# Altium PCB iForce-FPC-V0.1.PcbDoc (part 2 of 2)
Units mil, origin at the board's own origin, x right, y up, seen from the top; angles counter-clockwise.
Board outline 803.81 x 551.18 mil, 2 copper layers (Top Layer, Bottom Layer); 1 components, 2 nets, 4 pads, 4 vias.
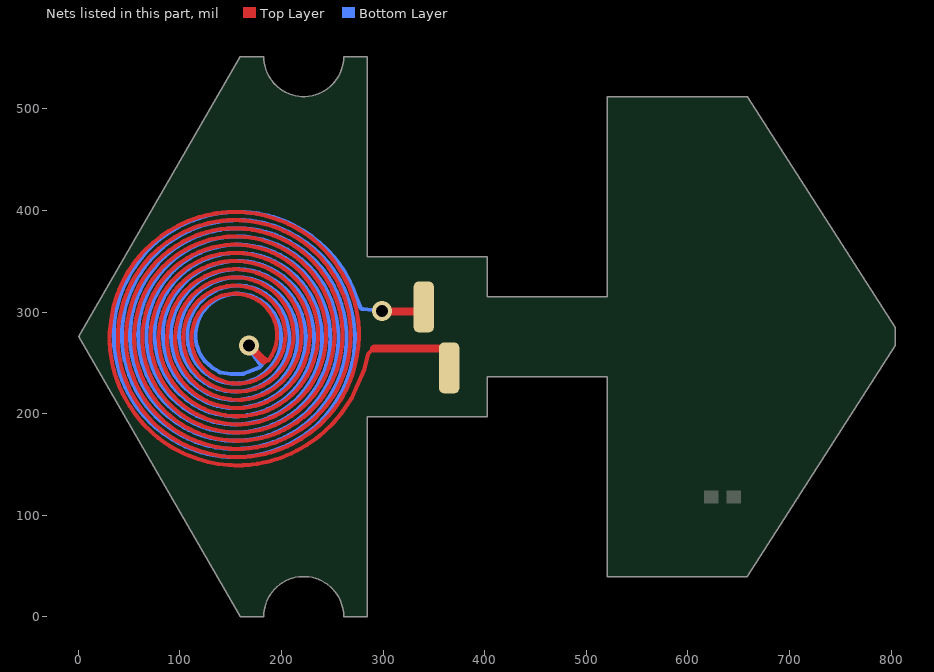
[diagram p2: the nets of this part, all layers, seen from the top]

## Via types
v1: diameter 19.68, hole 11.81, Top Layer to Bottom Layer, tented both sides, 4 vias

## Nets (pads, with @x,y where several pads share a name; then routed paths per layer and width w, separated by ;. In a path a pad name is that pad's centre, name@x,y a point inside that pad or via, vN(x,y) a via of type N, cw(c..) or ccw(c..) an arc to the next point about the centre after c; other vN are vias at no path point) (continued)
L2: pad.1 | length 11550.5
  Top Layer w3: pad.1@335,300.53 pad.1@340,305
  Top Layer w4: 182.46,252.54 187.25,252.54 ccw(c156.65,276.38) 192.85,262.45 ccw(c153.83,277.59) 194.57,267.99 ccw(c153.87,277.6) 195.51,273.73 ccw(c155.47,277.46) 195.63,279.54 ccw(c156.78,277.46) 193.31,290.84 ccw(c154.68,276.77) 190.95,296.12 ccw(c154.23,276.54) 184.17,305.45 ccw(c155.27,277.53) 179.88,309.3 ccw(c155.13,277.29) 175.08,312.49 ccw(c154.29,275.81) 169.87,314.99 ccw(c153.93,274.93) 164.37,316.76 ccw(c153.93,274.96) 158.68,317.78 ccw(c154.03,275.98) 152.91,318.02 ccw(c153.99,277.61) 147.17,317.46 ccw(c154.22,276.37) 141.57,316.09 ccw(c154.71,274.83) 136.19,313.98 ccw(c154.87,274.38) 122.35,303.7 ccw(c153.74,275.59) 115.92,294.15 ccw(c155.84,274.48) 113.71,288.82 ccw(c156.4,274.27) 111.41,277.5 ccw(c155.01,274.38) 111.38,271.73 ccw(c154.43,274.41) 113.62,260.44 ccw(c156.72,275.12) 115.83,255.1 ccw(c157.3,275.39) 122.16,245.45 ccw(c156.28,274.53) 126.18,241.3 ccw(c155.64,273.9) 135.66,234.77 ccw(c156.81,276.04) 140.95,232.46 ccw(c157.04,276.59) 157.97,229.63 ccw(c157.03,274.1) 163.72,230.12 ccw(c156.88,274.91) 169.35,231.35 ccw(c156.41,276.57) 174.8,233.28 ccw(c156,277.55) 179.98,235.86 ccw(c156.07,277.47) 189.22,242.77 ccw(c157.36,276.1) 193.13,247.01 ccw(c157.78,275.71) 196.48,251.71 ccw(c156.2,276.7) 199.22,256.79 ccw(c154.96,277.28) 201.33,262.17 ccw(c154.5,277.44) 203.6,273.49 ccw(c155.85,277.32) 203.71,279.27 ccw(c157.51,277.39) 203.12,285 ccw(c156.33,277.17) 201.82,290.62 ccw(c154.72,276.7) 199.86,296.06 ccw(c153.76,276.29) 197.28,301.23 ccw(c153.81,276.35) 190.43,310.52 ccw(c155.13,277.56) 186.24,314.5 ccw(c155.85,278.39) 181.61,317.94 ccw(c154.85,276.85) 176.6,320.8 ccw(c154.18,275.5) 171.28,323.06 ccw(c153.94,274.92) 154.28,326.09 ccw(c154,277.22) 148.52,325.78 ccw(c154,277.6) 142.84,324.79 ccw(c154.43,275.77) 137.3,323.14 ccw(c154.9,274.46) 131.98,320.87 ccw(c155.03,274.11) 117.97,310.78 ccw(c153.32,275.87) 114.16,306.44 ccw(c153.28,275.95) 110.89,301.69 ccw(c154.87,274.99) 108.17,296.6 ccw(c156.11,274.41) 106.03,291.23 ccw(c156.43,274.27) 103.26,274.18 ccw(c154,274.31) 103.6,268.42 ccw(c153.69,274.31) 104.6,262.74 ccw(c155.52,274.74) 106.23,257.2 ccw(c156.86,275.22) 108.46,251.87 ccw(c157.36,275.43) 118.35,237.69 ccw(c155.72,273.91) 122.59,233.77 ccw(c155.08,273.16) 127.23,230.36 ccw(c156.1,274.73) 132.24,227.48 ccw(c156.8,276.11) 137.52,225.15 ccw(c157.14,276.98) 154.45,221.63 ccw(c157.02,275.14) 160.22,221.67 ccw(c157.06,274) 171.57,223.62 ccw(c156.4,276.48) 177.03,225.5 ccw(c155.96,277.57) 182.28,227.94 ccw(c155.81,277.87) 191.88,234.37 ccw(c156.62,276.89) 196.13,238.29 ccw(c157.8,275.74) 199.93,242.62 ccw(c158,275.54) 203.24,247.35 ccw(c156.4,276.54) 206.04,252.4 ccw(c155.08,277.19) 208.3,257.72 ccw(c154.32,277.48) 211.73,274.66 ccw(c156.2,277.36) 211.71,280.44 ccw(c157.92,277.46) 211.08,286.17 ccw(c156.77,277.24) 209.85,291.81 ccw(c155.07,276.78) 208.04,297.29 ccw(c153.89,276.33) 205.69,302.57 ccw(c153.59,276.21) 195.68,316.68 ccw(c155.26,277.75) 191.47,320.62 ccw(c155.66,278.14) 181.94,327.09 ccw(c154.39,275.88) 176.72,329.58 ccw(c153.95,274.84) 171.28,331.53 ccw(c153.91,274.82) 154.18,334.13 ccw(c153.97,277.27) 148.42,333.86 ccw(c153.88,278.34) 142.72,333 ccw(c154.26,276.5) 137.13,331.57 ccw(c154.74,274.95) 131.7,329.58 ccw(c155.15,273.95) 126.49,327.08 ccw(c155.28,273.7) 116.88,320.65 ccw(c154.5,274.66) 112.59,316.78 ccw(c153.39,275.77) 108.71,312.51 ccw(c152.54,276.5) 105.28,307.88 ccw(c154.09,275.46) 102.33,302.92 ccw(c155.54,274.69) 99.87,297.69 ccw(c156.57,274.26) 97.91,292.25 ccw(c156.63,274.21) 95.21,275.16 ccw(c154.28,274.29) 95.41,269.39 ccw(c153.55,274.28) 97.51,258.06 ccw(c156.1,274.97) 99.37,252.59 ccw(c157.24,275.41) 101.74,247.32 ccw(c157.58,275.56) 111.6,233.11 ccw(c156.04,274.19) 115.72,229.06 ccw(c154.85,272.85) 120.21,225.43 ccw(c155.38,273.62) 125.03,222.26 ccw(c156.31,275.19) 130.13,219.56 ccw(c156.91,276.46) 135.47,217.34 ccw(c157.14,276.98) 158.16,213.53 ccw(c157.1,273.98) 163.92,213.91 ccw(c157.15,273.31) 169.61,214.84 ccw(c156.75,275.19) 175.19,216.3 ccw(c156.27,276.73) 180.62,218.28 ccw(c155.85,277.76) 185.85,220.74 ccw(c155.79,277.91) 199.95,230.77 ccw(c157.26,276.29) 203.98,234.91 ccw(c158.6,275.1) 207.59,239.41 ccw(c157.8,275.66) 210.77,244.23 ccw(c156.22,276.6) 213.48,249.32 ccw(c154.94,277.22) 215.74,254.64 ccw(c154.24,277.5) 219.84,277.29 ccw(c157,277.41) 219.59,283.06 ccw(c157.64,277.42) 217.49,294.39 ccw(c155.07,276.74) 215.67,299.87 ccw(c153.86,276.28) 213.37,305.18 ccw(c153.25,276) 203.86,319.64 ccw(c154.53,277.07) 199.9,323.85 ccw(c155.69,278.27) 195.58,327.67 ccw(c156.33,279.04) 190.93,331.08 ccw(c155.28,277.45) 185.98,334.06 ccw(c154.47,275.97) 180.79,336.59 ccw(c153.98,274.85) 175.39,338.66 ccw(c153.8,274.34) 158.41,342.03 ccw(c153.94,276.1) 152.63,342.17 ccw(c153.91,277.79) 146.88,341.8 ccw(c153.83,278.69) 141.18,340.91 ccw(c154.21,276.81) 135.58,339.51 ccw(c154.69,275.2) 130.12,337.62 ccw(c155.14,274.05) 124.83,335.28 ccw(c155.39,273.53) 110.4,325.71 ccw(c154.29,274.83) 106.19,321.76 ccw(c153.11,275.98) 102.35,317.45 ccw(c152.88,276.24) 95.88,307.91 ccw(c155.2,274.9) 93.29,302.75 ccw(c156.39,274.36) 91.14,297.38 ccw(c156.88,274.16) 87.16,274.69 ccw(c154.1,274.25) 87.37,268.92 ccw(c152.95,274.19) 89.3,257.56 ccw(c155.54,274.82) 90.99,252.04 ccw(c156.89,275.3) 93.14,246.67 ccw(c157.8,275.7) 105.86,227.46 ccw(c156.05,274.15) 109.97,223.41 ccw(c154.85,272.82) 114.41,219.71 ccw(c154.88,272.91) 119.14,216.42 ccw(c155.9,274.52) 124.15,213.54 ccw(c156.65,275.95) 129.38,211.09 ccw(c157.1,277.01) 134.79,209.06 ccw(c157.26,277.47) 151.78,205.68 ccw(c157.11,275.77) 157.55,205.48 ccw(c157.12,274.15) 163.31,205.75 ccw(c157.16,273.3) 174.66,207.77 ccw(c156.5,275.93) 180.18,209.49 ccw(c156.03,277.27) 185.54,211.64 ccw(c155.61,278.2) 204.8,224.3 ccw(c157.08,276.52) 208.91,228.36 ccw(c158.37,275.33) 212.65,232.75 ccw(c158.81,274.95) 216.02,237.44 ccw(c157.19,276.01) 218.98,242.39 ccw(c155.71,276.82) 221.54,247.57 ccw(c154.54,277.34) 223.67,252.94 ccw(c153.97,277.56) 227.87,275.6 ccw(c156.53,277.43) 227.78,281.38 ccw(c158.35,277.54) 227.23,287.12 ccw(c158.13,277.48) 226.19,292.8 ccw(c156.26,277.06) 224.7,298.37 ccw(c154.71,276.58) 222.77,303.82 ccw(c153.6,276.14) 220.41,309.1 ccw(c153.23,275.99) 207.16,327.96 ccw(c155.22,277.81) 202.99,331.95 ccw(c156.44,279.19) 198.51,335.58 ccw(c156.15,278.77) 193.75,338.84 ccw(c155.15,277.16) 188.74,341.71 ccw(c154.4,275.74) 183.51,344.17 ccw(c153.94,274.65) 178.11,346.23 ccw(c153.79,274.29) 155.4,350.22 ccw(c153.91,276.97) 149.63,350.11 ccw(c153.8,278.79) 143.89,349.54 ccw(c153.86,278.55) 138.21,348.51 ccw(c154.28,276.68) 132.64,347.03 ccw(c154.76,275.11) 127.18,345.12 ccw(c155.21,273.96) 121.89,342.8 ccw(c155.44,273.44) 102.87,329.76 ccw(c153.78,275.3) 98.81,325.66 ccw(c152.47,276.5) 95.08,321.25 ccw(c152.06,276.85) 91.72,316.56 ccw(c153.69,275.78) 88.74,311.62 ccw(c155.19,274.95) 86.14,306.46 ccw(c156.4,274.39) 83.94,301.12 ccw(c157.28,274.06) 79.23,278.54 ccw(c155.16,274.23) 79.13,272.77 ccw(c153.48,274.19) 79.46,267 ccw(c152.69,274.15) 81.48,255.65 ccw(c155.35,274.8) 83.14,250.12 ccw(c156.76,275.28) 85.21,244.73 ccw(c157.73,275.69) 87.67,239.49 ccw(c158.1,275.88) 97.26,225.06 ccw(c156.87,274.88) 101.13,220.77 ccw(c155.78,273.81) 105.3,216.78 ccw(c154.56,272.43) 109.77,213.13 ccw(c154.66,272.6) 114.5,209.83 ccw(c155.69,274.23) 119.48,206.91 ccw(c156.49,275.69) 124.66,204.36 ccw(c157.01,276.87) 130.03,202.2 ccw(c157.31,277.66) 152.62,197.56 ccw(c157.14,275.53) 158.39,197.44 ccw(c157.17,273.86) 164.16,197.75 ccw(c157.24,272.78) 175.52,199.68 ccw(c156.61,275.44) 181.07,201.29 ccw(c156.13,276.9) 186.49,203.29 ccw(c155.7,277.95) 191.75,205.69 ccw(c155.54,278.33) 210.72,218.81 ccw(c157.19,276.46) 214.81,222.89 ccw(c158.48,275.27) 218.58,227.26 ccw(c158.61,275.1) 225.07,236.79 ccw(c156.24,276.51) 227.77,241.89 ccw(c154.93,277.14) 230.1,247.18 ccw(c153.69,277.63) 233.62,258.2 ccw(c153.7,277.65) 235.55,269.6 ccw(c155.03,277.51) 235.91,275.37 ccw(c156.5,277.47) 235.86,281.14 ccw(c158.28,277.55) 235.38,286.89 ccw(c159.04,277.63) 234.47,292.59 ccw(c157.13,277.25) 233.14,298.2 ccw(c155.43,276.78) 231.4,303.71 ccw(c154.08,276.31) 229.28,309.09 ccw(c152.91,275.78) 223.93,319.34 ccw(c152.94,275.83) 217.22,328.76 ccw(c154,276.69) 213.39,333.09 ccw(c155.06,277.7) 209.27,337.13 ccw(c156.27,279.02) 204.86,340.86 ccw(c156.8,279.67) 200.2,344.25 ccw(c155.71,278.05) 195.3,347.3 ccw(c154.83,276.52) 190.18,349.98 ccw(c154.2,275.21) 184.89,352.31 ccw(c153.72,273.97) 173.88,355.84 ccw(c153.69,273.93) 162.49,357.83 ccw(c153.83,275.21) 156.72,358.23 ccw(c153.88,276.63) 150.95,358.23 ccw(c153.81,278.38) 145.19,357.81 ccw(c153.81,278.83) 133.85,355.73 ccw(c154.47,276.13) 128.31,354.09 ccw(c154.95,274.69) 122.9,352.06 ccw(c155.38,273.66) 117.64,349.67 ccw(c155.58,273.2) 98.54,336.71 ccw(c154.09,274.94) 94.38,332.7 ccw(c152.89,276.1) 90.52,328.42 ccw(c151.81,277.02) 83.77,319.07 ccw(c154.08,275.58) 80.9,314.06 ccw(c155.52,274.83) 78.39,308.85 ccw(c156.67,274.31) 76.24,303.49 ccw(c157.32,274.06) 71.07,275.16 ccw(c154.18,274.19) 71.2,269.39 ccw(c152.35,274.08) 71.74,263.65 ccw(c151.94,274.05) 72.68,257.96 ccw(c153.86,274.44) 74.03,252.34 ccw(c155.56,274.91) 75.76,246.83 ccw(c156.92,275.38) 77.86,241.45 ccw(c158.16,275.92) 83.11,231.15 ccw(c158.28,275.98) 89.68,221.63 ccw(c157.35,275.25) 93.42,217.22 ccw(c156.36,274.35) 97.45,213.08 ccw(c155.19,273.13) 101.74,209.22 ccw(c154.27,272.05) 111.09,202.47 ccw(c155.71,274.32) 116.09,199.59 ccw(c156.48,275.77) 121.29,197.06 ccw(c157.01,276.95) 126.64,194.87 ccw(c157.33,277.77) 154.91,189.41 ccw(c157.17,274.87) 160.69,189.45 ccw(c157.25,273.1) 166.44,189.89 ccw(c157.25,272.64) 177.79,191.95 ccw(c156.6,275.35) 183.34,193.56 ccw(c156.12,276.83) 188.77,195.53 ccw(c155.68,277.94) 194.06,197.86 ccw(c155.33,278.67) 213.42,210.44 ccw(c156.53,277.21) 217.69,214.33 ccw(c157.6,276.11) 221.69,218.49 ccw(c158.95,274.9) 225.4,222.91 ccw(c159.6,274.36) 228.79,227.57 ccw(c157.99,275.46) 231.86,232.46 ccw(c156.43,276.36) 234.6,237.54 ccw(c155.08,277.04) 237,242.8 ccw(c154.03,277.48) 239.06,248.21 ccw(c153.37,277.71) 243.73,270.81 ccw(c155.34,277.53) 243.98,276.58 ccw(c156.88,277.51) 243.85,282.36 ccw(c158.71,277.61) 243.34,288.1 ccw(c159.47,277.69) 242.43,293.8 ccw(c157.55,277.32) 241.15,299.43 ccw(c155.81,276.86) 239.49,304.96 ccw(c154.37,276.38) 237.47,310.37 ccw(c153.31,275.95) 235.11,315.65 ccw(c152.64,275.62) 222.5,334.99 ccw(c154.11,276.83) 218.62,339.27 ccw(c155.2,277.89) 214.47,343.28 ccw(c156.41,279.22) 210.06,347.01 ccw(c156.58,279.38) 200.56,353.55 ccw(c155.12,276.98) 195.5,356.33 ccw(c154.41,275.59) 190.27,358.79 ccw(c153.93,274.48) 184.89,360.91 ccw(c153.67,273.8) 156.59,366.29 ccw(c153.84,276.7) 150.81,366.28 ccw(c153.78,278.44) 145.05,365.89 ccw(c153.69,279.54) 133.68,363.98 ccw(c154.3,276.84) 128.11,362.47 ccw(c154.78,275.27) 122.64,360.61 ccw(c155.25,274.04) 117.3,358.4 ccw(c155.74,272.96) 107.06,353.02 ccw(c155.73,272.95) 97.57,346.41 ccw(c154.99,273.88) 93.15,342.68 ccw(c154.11,274.86) 88.98,338.69 ccw(c152.93,276.01) 85.07,334.43 ccw(c151.51,277.24) 81.45,329.94 ccw(c151.66,277.15) 78.14,325.22 ccw(c153.29,276.08) 75.14,320.29 ccw(c154.82,275.22) 72.45,315.17 ccw(c156.14,274.58) 70.09,309.9 ccw(c157.5,274.03) 66.37,298.95 ccw(c157.68,273.95) 63.34,281.88 ccw(c155.91,274.13) 63.04,276.11 ccw(c154.42,274.16) 63.09,270.34 ccw(c152.65,274.08) 63.52,264.58 ccw(c151.83,274.02) 65.49,253.22 ccw(c154.56,274.65) 67.02,247.65 ccw(c156.12,275.13) 68.89,242.18 ccw(c157.35,275.59) 71.1,236.84 ccw(c158.44,276.09) 76.47,226.6 ccw(c158.22,275.92) 86.73,212.63 ccw(c156.64,274.56) 90.69,208.43 ccw(c155.5,273.42) 94.91,204.48 ccw(c154.28,272.03) 99.36,200.81 ccw(c153.92,271.6) 104.04,197.44 ccw(c155.02,273.23) 108.93,194.37 ccw(c155.94,274.79) 114,191.61 ccw(c156.63,276.17) 119.24,189.17 ccw(c157.11,277.27) 124.62,187.05 ccw(c157.4,278.05) 152.89,181.43 ccw(c157.21,275.39) 158.66,181.34 ccw(c157.24,273.72) 164.43,181.61 ccw(c157.39,271.83) 170.16,182.24 ccw(c157.33,272.05) 175.85,183.24 ccw(c156.93,273.97) 181.46,184.59 ccw(c156.47,275.67) 186.98,186.29 ccw(c155.99,277.08) 192.39,188.32 ccw(c155.4,278.5) 202.81,193.34 ccw(c155.22,278.86) 217.15,203.08 ccw(c156.19,277.64) 221.52,206.87 ccw(c157.14,276.62) 225.64,210.91 ccw(c158.36,275.45) 229.5,215.2 ccw(c159.81,274.22) 233.09,219.72 ccw(c159.41,274.49) 236.39,224.45 ccw(c157.78,275.55) 239.38,229.39 ccw(c156.26,276.42) 242.07,234.5 ccw(c154.93,277.07) 244.45,239.76 ccw(c153.52,277.64) 248.27,250.68 ccw(c153.13,277.78) 251.54,267.71 ccw(c154.67,277.6) 251.95,273.47 ccw(c156.05,277.54) 252.02,279.25 ccw(c157.73,277.58) 251.74,285.02 ccw(c159.62,277.73) 251.11,290.75 ccw(c159.42,277.68) 250.12,296.43 ccw(c157.51,277.28) 248.78,302.05 ccw(c155.79,276.82) 247.1,307.57 ccw(c154.36,276.34) 245.09,312.99 ccw(c152.89,275.73) 240.14,323.45 ccw(c152.63,275.63) 226.8,342.29 ccw(c154.49,277.24) 222.81,346.47 ccw(c155.63,278.4) 218.58,350.4 ccw(c156.86,279.8) 214.12,354.06 ccw(c157.25,280.28) 209.45,357.44 ccw(c156.15,278.65) 204.57,360.53 ccw(c155.22,277.08) 199.52,363.32 ccw(c154.49,275.67) 194.3,365.81 ccw(c153.98,274.52) 188.95,367.99 ccw(c153.64,273.66) 155,374.37 ccw(c153.8,277.19) 149.23,374.27 ccw(c153.71,278.98) 143.47,373.82 ccw(c153.64,279.88) 132.1,371.88 ccw(c154.26,277.14) 126.52,370.4 ccw(c154.73,275.53) 121.04,368.6 ccw(c155.21,274.22) 115.66,366.47 ccw(c155.76,272.95) 105.31,361.32 ccw(c155.84,272.76) 91.03,351.48 ccw(c154.82,274.03) 86.68,347.67 ccw(c153.87,275.06) 82.56,343.63 ccw(c152.65,276.23) 78.68,339.35 ccw(c151.21,277.46) 75.07,334.85 ccw(c151.26,277.45) 71.74,330.14 ccw(c152.9,276.36) 68.69,325.24 ccw(c154.45,275.46) 65.94,320.16 ccw(c155.83,274.76) 63.49,314.93 ccw(c156.96,274.27) 61.33,309.56 ccw(c157.75,273.95) 54.98,275.61 ccw(c154.24,274.12) 55.06,269.83 ccw(c152.46,274.04) 55.48,264.08 ccw(c151.23,273.93) 57.34,252.69 ccw(c153.93,274.52) 58.78,247.1 ccw(c155.58,274.99) 60.54,241.6 ccw(c156.94,275.47) 62.61,236.2 ccw(c158.32,276.05) 67.64,225.79 ccw(c158.5,276.11) 81.01,206.96 ccw(c156.65,274.52) 84.98,202.76 ccw(c155.51,273.38) 89.18,198.8 ccw(c154.3,272.01) 93.6,195.09 ccw(c154.02,271.72) 103.06,188.5 ccw(c155.53,274.12) 108.07,185.63 ccw(c156.31,275.59) 113.24,183.04 ccw(c156.89,276.84) 118.54,180.75 ccw(c157.4,278.13) 129.51,177.06 ccw(c157.49,278.38) 146.55,173.84 ccw(c157.31,276.85) 152.31,173.4 ccw(c157.25,275.5) 158.09,173.28 ccw(c157.26,273.86) 163.86,173.5 ccw(c157.39,272.01) 169.6,174.04 ccw(c157.34,272) 180.94,176.14 ccw(c156.69,274.77) 186.51,177.68 ccw(c156.21,276.34) 191.98,179.53 ccw(c155.75,277.61) 197.35,181.68 ccw(c155.2,278.84) 207.69,186.86 ccw(c155.11,279.05) 222,196.65 ccw(c156.07,277.83) 226.39,200.42 ccw(c156.98,276.83) 230.55,204.42 ccw(c158.15,275.68) 234.48,208.65 ccw(c159.54,274.46) 238.16,213.09 ccw(c159.61,274.36) 244.72,222.58 ccw(c157.19,275.86) 247.58,227.6 ccw(c155.74,276.64) 250.16,232.76 ccw(c154.49,277.22) 252.45,238.07 ccw(c153.19,277.73) 256.16,249.03 ccw(c152.89,277.84) 259.45,266.06 ccw(c154.34,277.66) 259.93,271.82 ccw(c155.65,277.59) 260.09,277.59 ccw(c157.25,277.59) 259.92,283.36 ccw(c159.07,277.69) 259.44,289.11 ccw(c159.79,277.75) 257.47,300.48 ccw(c157.02,277.13) 256.01,306.06 ccw(c155.39,276.65) 254.24,311.56 ccw(c154.04,276.18) 252.16,316.96 ccw(c152.65,275.59) 247.16,327.38 ccw(c152.36,275.47) 233.96,346.34 ccw(c154.09,276.91) 230.05,350.6 ccw(c155.18,277.97) 225.92,354.63 ccw(c156.38,279.28) 221.57,358.42 ccw(c157.59,280.75) 217.01,361.96 ccw(c157.04,279.97) 212.26,365.24 ccw(c155.99,278.34) 207.33,368.24 ccw(c155.11,276.8) 202.24,370.96 ccw(c154.42,275.44) 197,373.41 ccw(c153.76,273.88) 186.16,377.44 ccw(c153.51,273.17) 163.51,381.98 ccw(c153.71,275.05) 157.74,382.35 ccw(c153.77,276.45) 151.96,382.41 ccw(c153.74,278.13) 146.2,382.15 ccw(c153.6,280.01) 140.46,381.57 ccw(c153.52,280.75) 134.76,380.67 ccw(c153.88,278.81) 129.12,379.45 ccw(c154.33,277.01) 123.55,377.92 ccw(c154.81,275.43) 118.07,376.08 ccw(c155.28,274.13) 112.7,373.96 ccw(c155.84,272.83) 102.31,368.86 ccw(c155.89,272.68) 83.42,355.57 ccw(c154.4,274.45) 79.18,351.65 ccw(c153.32,275.55) 75.15,347.51 ccw(c152.02,276.75) 71.36,343.15 ccw(c150.54,277.97) 67.82,338.6 ccw(c151.27,277.45) 64.54,333.85 ccw(c152.9,276.39) 61.53,328.93 ccw(c154.45,275.5) 58.79,323.85 ccw(c155.83,274.8) 56.32,318.62 ccw(c157.42,274.11) 52.22,307.81 ccw(c158.05,273.87) 47.05,279.43 ccw(c155.25,274.08) 46.92,273.65 ccw(c153.63,274.07) 47.1,267.88 ccw(c151.8,273.96) 47.59,262.13 ccw(c150.97,273.9) 49.53,250.76 ccw(c153.75,274.5) 50.96,245.17 ccw(c155.41,274.97) 52.69,239.66 ccw(c156.8,275.45) 54.71,234.24 ccw(c158.3,276.07) 59.59,223.76 ccw(c158.89,276.35) 72.45,204.56 ccw(c157.41,275.16) 76.26,200.21 ccw(c156.38,274.21) 80.29,196.08 ccw(c155.22,273.02) 84.53,192.16 ccw(c154,271.62) 88.98,188.48 ccw(c153.79,271.41) 98.44,181.89 ccw(c155.32,273.84) 103.43,178.98 ccw(c156.14,275.32) 108.57,176.35 ccw(c156.76,276.63) 113.85,173.98 ccw(c157.36,278.07) 124.73,170.07 ccw(c157.54,278.6) 147.41,165.67 ccw(c157.33,276.65) 153.18,165.31 ccw(c157.28,275.24) 158.96,165.24 ccw(c157.31,273.57) 164.73,165.49 ccw(c157.44,271.7) 170.47,166.04 ccw(c157.43,271.46) 181.83,168.07 ccw(c156.8,274.26) 187.41,169.55 ccw(c156.32,275.89) 192.91,171.31 ccw(c155.84,277.26) 198.31,173.36 ccw(c155.24,278.71) 208.78,178.27 ccw(c154.97,279.27) 227.97,191.14 ccw(c156.16,277.79) 232.33,194.94 ccw(c157.09,276.77) 236.48,198.96 ccw(c158.27,275.62) 240.41,203.19 ccw(c159.66,274.39) 244.11,207.62 ccw(c160.18,273.95) 250.76,217.04 ccw(c157.78,275.49) 253.7,222.01 ccw(c156.26,276.33) 256.38,227.13 ccw(c154.93,276.99) 258.8,232.38 ccw(c153.4,277.63) 262.82,243.22 ccw(c152.86,277.84) 267.97,271.61 ccw(c155.63,277.63) 268.14,277.38 ccw(c157.22,277.62) 268,283.16 ccw(c159.03,277.71) 267.56,288.91 ccw(c160.55,277.86) 265.76,300.3 ccw(c157.88,277.31) 264.41,305.92 ccw(c156.16,276.85) 262.77,311.45 ccw(c154.67,276.37) 260.85,316.9 ccw(c152.99,275.72) 256.19,327.48 ccw(c152.09,275.29) 240.16,351.48 ccw(c153.95,276.84) 236.26,355.75 ccw(c155.03,277.87) 232.16,359.82 ccw(c156.22,279.14) 227.85,363.66 ccw(c157.45,280.59) 223.36,367.27 ccw(c157.69,280.88) 218.67,370.64 ccw(c156.58,279.24) 213.82,373.76 ccw(c155.61,277.65) 208.8,376.62 ccw(c154.82,276.18) 203.65,379.23 ccw(c154.22,274.91) 198.36,381.57 ccw(c153.64,273.49) 187.47,385.46 ccw(c153.45,272.94) 164.8,389.94 ccw(c153.66,274.79) 159.03,390.35 ccw(c153.72,276.15) 153.26,390.47 ccw(c153.72,277.77) 147.48,390.3 ccw(c153.62,279.59) 141.73,389.83 ccw(c153.49,280.9) 130.34,387.99 ccw(c154.05,278.18) 124.74,386.63 ccw(c154.52,276.46) 119.2,384.98 ccw(c155,274.98) 113.75,383.06 ccw(c155.65,273.3) 103.17,378.41 ccw(c156.11,272.34) 79.1,362.47 ccw(c154.64,274.13) 74.81,358.61 ccw(c153.64,275.19) 70.71,354.54 ccw(c152.41,276.36) 66.83,350.26 ccw(c150.99,277.59) 63.17,345.8 ccw(c150.87,277.72) 56.58,336.33 ccw(c153.3,276.18) 53.66,331.35 ccw(c154.81,275.35) 50.98,326.23 ccw(c156.14,274.69) 48.57,320.98 ccw(c157.68,274.04) 44.52,310.15 ccw(c158.36,273.8) 39.13,281.8 ccw(c155.81,274.02) 38.89,276.02 ccw(c154.29,274.05) 38.93,270.25 ccw(c152.55,273.99) 39.27,264.49 ccw(c150.64,273.83) 39.9,258.75 ccw(c150.23,273.79) 40.82,253.06 ccw(c152.18,274.16) 42.04,247.42 ccw(c154,274.6) 43.55,241.84 ccw(c155.61,275.08) 45.32,236.35 ccw(c156.97,275.55) 47.37,230.94 ccw(c158.45,276.16) 52.24,220.45 ccw(c158.96,276.39) 68.61,196.68 ccw(c156.92,274.68) 72.54,192.44 ccw(c155.82,273.6) 76.67,188.41 ccw(c154.62,272.31) 81,184.59 ccw(c153.39,270.84) 85.51,180.99 ccw(c153.26,270.7) 90.2,177.64 ccw(c154.38,272.35) 95.06,174.52 ccw(c155.34,273.94) 100.07,171.65 ccw(c156.14,275.41) 105.22,169.03 ccw(c156.76,276.7) 110.49,166.66 ccw(c157.37,278.17) 121.35,162.69 ccw(c157.57,278.71) 149.73,157.43 ccw(c157.34,276.08) 155.51,157.2 ccw(c157.32,274.56) 161.28,157.25 ccw(c157.38,272.81) 167.04,157.59 ccw(c157.54,270.91) 172.78,158.22 ccw(c157.59,270.41) 178.47,159.14 ccw(c157.22,272.36) 184.12,160.34 ccw(c156.79,274.18) 189.7,161.83 ccw(c156.31,275.81) 195.2,163.59 ccw(c155.83,277.2) 200.61,165.61 ccw(c155.21,278.72) 211.13,170.42 ccw(c154.89,279.4) 235.04,186.58 ccw(c156.46,277.5) 239.32,190.47 ccw(c157.48,276.42) 243.41,194.55 ccw(c158.72,275.25) 247.29,198.83 ccw(c160.15,274.02) 250.94,203.29 ccw(c160.4,273.78) 257.56,212.74 ccw(c157.97,275.34) 260.52,217.7 ccw(c156.45,276.19) 263.22,222.8 ccw(c155.08,276.88) 265.68,228.03 ccw(c153.47,277.58) 269.85,238.82 ccw(c152.43,277.94) 275.72,267.08 ccw(c154.59,277.71) 276.09,272.85 ccw(c155.99,277.65) 276.18,278.62 ccw(c157.63,277.67) 275.99,284.4 ccw(c159.45,277.77) 275.52,290.15 ccw(c160.97,277.93) 273.73,301.54 ccw(c158.29,277.39) 272.41,307.16 ccw(c156.54,276.93) 270.82,312.71 ccw(c155,276.45) 268.96,318.18 ccw(c153.19,275.77) 264.48,328.84 ccw(c151.91,275.18) 245.4,357.71 ccw(c154.07,277) 241.47,361.95 ccw(c155.17,278.07) 237.34,365.99 ccw(c156.37,279.34) 233.03,369.83 ccw(c157.6,280.8) 228.54,373.45 ccw(c158.05,281.37) 223.87,376.84 ccw(c156.93,279.74) 219.04,380 ccw(c155.93,278.13) 214.06,382.92 ccw(c155.09,276.63) 208.95,385.6 ccw(c154.43,275.28) 203.71,388.04 ccw(c153.74,273.69) 192.91,392.17 ccw(c153.4,272.69) 164.64,398.03 ccw(c153.63,274.84) 158.87,398.41 ccw(c153.69,276.22) 153.1,398.52 ccw(c153.68,277.84) 147.32,398.36 ccw(c153.58,279.66) 141.57,397.91 ccw(c153.39,281.59) 135.85,397.19 ccw(c153.51,280.87) 130.17,396.18 ccw(c153.9,278.94) 124.54,394.9 ccw(c154.35,277.17) 118.98,393.35 ccw(c154.83,275.59) 113.49,391.54 ccw(c155.3,274.26) 108.09,389.47 ccw(c155.91,272.8) 97.6,384.6 ccw(c156.2,272.19) 73.69,368.43 ccw(c154.66,274.06) 69.39,364.56 ccw(c153.67,275.11) 65.28,360.5 ccw(c152.46,276.27) 61.37,356.26 ccw(c151.07,277.49) 57.67,351.83 ccw(c150.19,278.22) 50.93,342.46 ccw(c152.55,276.66) 47.91,337.54 ccw(c154.11,275.76) 45.13,332.48 ccw(c155.53,275.02) 42.58,327.3 ccw(c157.27,274.22) 38.21,316.59 ccw(c158.61,273.73) 31.12,282.71 ccw(c155.87,273.99) 30.85,276.94 ccw(c154.36,274.02) 30.85,271.17 ccw(c152.63,273.98) 31.12,265.4 ccw(c150.73,273.85) 31.66,259.66 ccw(c149.9,273.77) 33.58,248.29 ccw(c152.76,274.37) 34.95,242.68 ccw(c154.53,274.85) 36.58,237.14 ccw(c156.1,275.35) 38.46,231.68 ccw(c157.43,275.84) 40.6,226.31 ccw(c158.88,276.47) 45.59,215.88 ccw(c159.54,276.79) 61.96,192.1 ccw(c157.73,275.29) 65.85,187.82 ccw(c156.7,274.31) 69.92,183.73 ccw(c155.56,273.12) 74.18,179.84 ccw(c154.36,271.73) 78.62,176.15 ccw(c153.69,270.93) 88,169.42 ccw(c155.06,273) 92.91,166.4 ccw(c155.83,274.32) 97.96,163.61 ccw(c156.69,276) 108.43,158.73 ccw(c157.36,277.6) 147.67,149.42 ccw(c157.06,274.73) 153.45,149.12 ccw(c157.02,273.34) 159.23,149.09 ccw(c157.05,271.78) 165.02,149.33 ccw(c157.16,270.11) 170.78,149.84 ccw(c157.25,269.19) 182.22,151.7 ccw(c156.45,273.11) 187.87,153.04 ccw(c155.79,275.62) 193.46,154.64 ccw(c155.1,277.82) 198.97,156.5 ccw(c154.44,279.67) 204.4,158.6 ccw(c153.62,281.63) 214.96,163.5 ccw(c153.27,282.35) 234.53,175.92 ccw(c154.89,280.17) 239.04,179.53 ccw(c156.2,278.6) 243.36,183.31 ccw(c157.88,276.77) 247.5,187.27 ccw(c159.91,274.75) 251.43,191.39 ccw(c162.26,272.61) 255.16,195.68 ccw(c164.9,270.42) 258.65,200.12 268.78,214.68 ccw(c265.49,216.96) 269.16,215.35 281.68,243.99 281.82,244.3 285.32,258.29 285.59,259.36 290.01,263.79 291.27,264
  Top Layer w8: v1(168,267) 182.46,252.54 ; 291.27,264 359.08,264 365,258.08 pad.1@365,245 ; v1@300.83,300.53 pad.1@335,300.53
  Bottom Layer w4: 180.1,250.24 180.1,247.29 178.35,245.54 162.68,239.27 cw(c161.2,242.99) 161.27,238.99 150.19,238.8 140.11,240.52 cw(c140.78,244.46) 138.72,241.03 132.01,245.1 cw(c134.08,248.52) 131.39,245.55 123.78,252.54 cw(c154.38,276.38) 118.18,262.45 cw(c157.2,277.59) 116.46,267.99 cw(c157.16,277.6) 115.52,273.73 cw(c155.56,277.46) 115.4,279.54 cw(c154.25,277.46) 117.72,290.84 cw(c156.35,276.77) 120.07,296.12 cw(c156.8,276.54) 126.85,305.45 cw(c155.76,277.53) 131.15,309.3 cw(c155.9,277.29) 135.95,312.49 cw(c156.74,275.81) 141.16,314.99 cw(c157.1,274.93) 146.66,316.76 cw(c157.1,274.96) 152.35,317.78 cw(c157,275.98) 158.12,318.02 cw(c157.04,277.61) 163.86,317.46 cw(c156.81,276.37) 169.46,316.09 cw(c156.32,274.83) 174.84,313.98 cw(c156.15,274.38) 188.67,303.7 cw(c157.29,275.59) 195.11,294.15 cw(c155.18,274.48) 197.32,288.82 cw(c154.62,274.27) 199.61,277.5 cw(c156.02,274.38) 199.65,271.73 cw(c156.6,274.41) 197.41,260.44 cw(c154.31,275.12) 195.2,255.1 cw(c153.73,275.39) 188.87,245.45 cw(c154.75,274.53) 184.85,241.3 cw(c155.39,273.9) 175.37,234.77 cw(c154.22,276.04) 170.08,232.46 cw(c153.99,276.59) 153.06,229.63 cw(c153.99,274.1) 147.31,230.12 cw(c154.15,274.91) 141.67,231.35 cw(c154.62,276.57) 136.23,233.28 cw(c155.03,277.55) 131.05,235.86 cw(c154.96,277.47) 121.81,242.77 cw(c153.67,276.1) 117.89,247.01 cw(c153.24,275.71) 114.55,251.71 cw(c154.83,276.7) 111.81,256.79 cw(c156.07,277.28) 109.7,262.17 cw(c156.53,277.44) 107.43,273.49 cw(c155.18,277.32) 107.32,279.27 cw(c153.52,277.39) 107.91,285 cw(c154.7,277.17) 109.21,290.62 cw(c156.31,276.7) 111.17,296.06 cw(c157.27,276.29) 113.75,301.23 cw(c157.22,276.35) 120.6,310.52 cw(c155.9,277.56) 124.79,314.5 cw(c155.17,278.39) 129.42,317.94 cw(c156.18,276.85) 134.43,320.8 cw(c156.85,275.5) 139.75,323.06 cw(c157.09,274.92) 156.75,326.09 cw(c157.02,277.22) 162.51,325.78 cw(c157.03,277.6) 168.19,324.79 cw(c156.6,275.77) 173.73,323.14 cw(c156.13,274.46) 179.04,320.87 cw(c156,274.11) 193.06,310.78 cw(c157.71,275.87) 196.87,306.44 cw(c157.74,275.95) 200.14,301.69 cw(c156.16,274.99) 202.86,296.6 cw(c154.92,274.41) 205,291.23 cw(c154.6,274.27) 207.77,274.18 cw(c157.03,274.31) 207.43,268.42 cw(c157.34,274.31) 206.43,262.74 cw(c155.51,274.74) 204.8,257.2 cw(c154.16,275.22) 202.57,251.87 cw(c153.67,275.43) 192.68,237.69 cw(c155.3,273.91) 188.44,233.77 cw(c155.95,273.16) 183.79,230.36 cw(c154.93,274.73) 178.79,227.48 cw(c154.22,276.11) 173.5,225.15 cw(c153.89,276.98) 156.58,221.63 cw(c154.01,275.14) 150.81,221.67 cw(c153.97,274) 139.45,223.62 cw(c154.63,276.48) 133.99,225.5 cw(c155.06,277.57) 128.75,227.94 cw(c155.22,277.87) 119.15,234.37 cw(c154.41,276.89) 114.9,238.29 cw(c153.23,275.74) 111.1,242.62 cw(c153.03,275.54) 107.79,247.35 cw(c154.63,276.54) 104.99,252.4 cw(c155.95,277.19) 102.73,257.72 cw(c156.71,277.48) 99.3,274.66 cw(c154.83,277.36) 99.32,280.44 cw(c153.1,277.46) 99.94,286.17 cw(c154.26,277.24) 101.18,291.81 cw(c155.96,276.78) 102.99,297.29 cw(c157.14,276.33) 105.34,302.57 cw(c157.43,276.21) 115.35,316.68 cw(c155.77,277.75) 119.56,320.62 cw(c155.37,278.14) 129.09,327.09 cw(c156.64,275.88) 134.31,329.58 cw(c157.08,274.84) 139.75,331.53 cw(c157.12,274.82) 156.84,334.13 cw(c157.06,277.27) 162.61,333.86 cw(c157.15,278.34) 168.31,333 cw(c156.77,276.5) 173.9,331.57 cw(c156.29,274.95) 179.33,329.58 cw(c155.87,273.95) 184.54,327.08 cw(c155.75,273.7) 194.15,320.65 cw(c156.52,274.66) 198.43,316.78 cw(c157.64,275.77) 202.32,312.51 cw(c158.49,276.5) 205.75,307.88 cw(c156.94,275.46) 208.7,302.92 cw(c155.49,274.69) 211.16,297.69 cw(c154.46,274.26) 213.11,292.25 cw(c154.4,274.21) 215.81,275.16 cw(c156.75,274.29) 215.62,269.39 cw(c157.47,274.28) 213.52,258.06 cw(c154.93,274.97) 211.66,252.59 cw(c153.79,275.41) 209.29,247.32 cw(c153.44,275.56) 199.42,233.11 cw(c154.99,274.19) 195.31,229.06 cw(c156.18,272.85) 190.82,225.43 cw(c155.64,273.62) 186,222.26 cw(c154.71,275.19) 180.9,219.56 cw(c154.11,276.46) 175.56,217.34 cw(c153.89,276.98) 152.87,213.53 cw(c153.93,273.98) 147.11,213.91 cw(c153.88,273.31) 141.42,214.84 cw(c154.28,275.19) 135.84,216.3 cw(c154.76,276.73) 130.41,218.28 cw(c155.18,277.76) 125.17,220.74 cw(c155.23,277.91) 111.07,230.77 cw(c153.77,276.29) 107.05,234.91 cw(c152.43,275.1) 103.44,239.41 cw(c153.23,275.66) 100.26,244.23 cw(c154.8,276.6) 97.54,249.32 cw(c156.09,277.22) 95.29,254.64 cw(c156.79,277.5) 91.18,277.29 cw(c154.02,277.41) 91.44,283.06 cw(c153.38,277.42) 93.54,294.39 cw(c155.96,276.74) 95.36,299.87 cw(c157.17,276.28) 97.66,305.18 cw(c157.78,276) 107.17,319.64 cw(c156.5,277.07) 111.13,323.85 cw(c155.34,278.27) 115.45,327.67 cw(c154.7,279.04) 120.1,331.08 cw(c155.75,277.45) 125.05,334.06 cw(c156.56,275.97) 130.24,336.59 cw(c157.05,274.85) 135.64,338.66 cw(c157.23,274.34) 152.62,342.03 cw(c157.08,276.1) 158.39,342.17 cw(c157.12,277.79) 164.15,341.8 cw(c157.2,278.69) 169.85,340.91 cw(c156.82,276.81) 175.45,339.51 cw(c156.34,275.2) 180.91,337.62 cw(c155.89,274.05) 186.2,335.28 cw(c155.64,273.53) 200.63,325.71 cw(c156.73,274.83) 204.84,321.76 cw(c157.92,275.98) 208.68,317.45 cw(c158.15,276.24) 215.15,307.91 cw(c155.83,274.9) 217.74,302.75 cw(c154.64,274.36) 219.89,297.38 cw(c154.15,274.16) 223.87,274.69 cw(c156.93,274.25) 223.66,268.92 cw(c158.08,274.19) 221.73,257.56 cw(c155.49,274.82) 220.04,252.04 cw(c154.14,275.3) 217.89,246.67 cw(c153.23,275.7) 205.17,227.46 cw(c154.97,274.15) 201.06,223.41 cw(c156.18,272.82) 196.62,219.71 cw(c156.15,272.91) 191.89,216.42 cw(c155.12,274.52) 186.88,213.54 cw(c154.38,275.95) 181.65,211.09 cw(c153.93,277.01) 176.24,209.06 cw(c153.77,277.47) 159.25,205.68 cw(c153.92,275.77) 153.48,205.48 cw(c153.91,274.15) 147.71,205.75 cw(c153.87,273.3) 136.36,207.77 cw(c154.53,275.93) 130.85,209.49 cw(c155,277.27) 125.49,211.64 cw(c155.42,278.2) 106.22,224.3 cw(c153.95,276.52) 102.12,228.36 cw(c152.66,275.33) 98.38,232.75 cw(c152.22,274.95) 95.01,237.44 cw(c153.84,276.01) 92.05,242.39 cw(c155.32,276.82) 89.49,247.57 cw(c156.49,277.34) 87.35,252.94 cw(c157.06,277.56) 83.16,275.6 cw(c154.5,277.43) 83.25,281.38 cw(c152.68,277.54) 83.8,287.12 cw(c152.9,277.48) 84.83,292.8 cw(c154.77,277.06) 86.33,298.37 cw(c156.32,276.58) 88.26,303.82 cw(c157.43,276.14) 90.62,309.1 cw(c157.8,275.99) 103.87,327.96 cw(c155.81,277.81) 108.04,331.95 cw(c154.59,279.19) 112.52,335.58 cw(c154.87,278.77) 117.28,338.84 cw(c155.88,277.16) 122.29,341.71 cw(c156.63,275.74) 127.51,344.17 cw(c157.09,274.65) 132.92,346.23 cw(c157.24,274.29) 155.62,350.22 cw(c157.12,276.97) 161.4,350.11 cw(c157.23,278.79) 167.14,349.54 cw(c157.17,278.55) 172.81,348.51 cw(c156.75,276.68) 178.39,347.03 cw(c156.27,275.11) 183.85,345.12 cw(c155.82,273.96) 189.14,342.8 cw(c155.59,273.44) 208.16,329.76 cw(c157.24,275.3) 212.22,325.66 cw(c158.56,276.5) 215.95,321.25 cw(c158.97,276.85) 219.31,316.56 cw(c157.34,275.78) 222.29,311.62 cw(c155.84,274.95) 224.89,306.46 cw(c154.63,274.39) 227.09,301.12 cw(c153.75,274.06) 231.79,278.54 cw(c155.87,274.23) 231.9,272.77 cw(c157.55,274.19) 231.57,267 cw(c158.34,274.15) 229.55,255.65 cw(c155.68,274.8) 227.89,250.12 cw(c154.27,275.28) 225.82,244.73 cw(c153.3,275.69) 223.36,239.49 cw(c152.93,275.88) 213.77,225.06 cw(c154.16,274.88) 209.9,220.77 cw(c155.25,273.81) 205.73,216.78 cw(c156.47,272.43) 201.26,213.13 cw(c156.37,272.6) 196.53,209.83 cw(c155.33,274.23) 191.55,206.91 cw(c154.54,275.69) 186.36,204.36 cw(c154.02,276.87) 181,202.2 cw(c153.72,277.66) 158.41,197.56 cw(c153.89,275.53) 152.63,197.44 cw(c153.86,273.86) 146.87,197.75 cw(c153.79,272.78) 135.5,199.68 cw(c154.42,275.44) 129.96,201.29 cw(c154.9,276.9) 124.54,203.29 cw(c155.33,277.95) 119.28,205.69 cw(c155.49,278.33) 100.31,218.81 cw(c153.84,276.46) 96.22,222.89 cw(c152.55,275.27) 92.45,227.26 cw(c152.42,275.1) 85.96,236.79 cw(c154.78,276.51) 83.26,241.89 cw(c156.1,277.14) 80.93,247.18 cw(c157.34,277.63) 77.41,258.2 cw(c157.33,277.65) 75.47,269.6 cw(c156,277.51) 75.12,275.37 cw(c154.53,277.47) 75.17,281.14 cw(c152.74,277.55) 75.65,286.89 cw(c151.99,277.63) 76.56,292.59 cw(c153.9,277.25) 77.89,298.2 cw(c155.6,276.78) 79.63,303.71 cw(c156.95,276.31) 81.75,309.09 cw(c158.12,275.78) 87.09,319.34 cw(c158.08,275.83) 93.81,328.76 cw(c157.03,276.69) 97.64,333.09 cw(c155.97,277.7) 101.76,337.13 cw(c154.76,279.02) 106.16,340.86 cw(c154.23,279.67) 110.83,344.25 cw(c155.32,278.05) 115.73,347.3 cw(c156.2,276.52) 120.84,349.98 cw(c156.83,275.21) 126.14,352.31 cw(c157.31,273.97) 137.15,355.84 cw(c157.34,273.93) 148.54,357.83 cw(c157.2,275.21) 154.31,358.23 cw(c157.15,276.63) 160.08,358.23 cw(c157.22,278.38) 165.84,357.81 cw(c157.22,278.83) 177.18,355.73 cw(c156.56,276.13) 182.72,354.09 cw(c156.08,274.69) 188.13,352.06 cw(c155.65,273.66) 193.39,349.67 cw(c155.44,273.2) 212.49,336.71 cw(c156.94,274.94) 216.64,332.7 cw(c158.14,276.1) 220.51,328.42 cw(c159.22,277.02) 227.26,319.07 cw(c156.95,275.58) 230.12,314.06 cw(c155.51,274.83) 232.64,308.85 cw(c154.36,274.31) 234.79,303.49 cw(c153.71,274.06) 239.96,275.16 cw(c156.85,274.19) 239.83,269.39 cw(c158.67,274.08) 239.29,263.65 cw(c159.09,274.05) 238.34,257.96 cw(c157.16,274.44) 237,252.34 cw(c155.47,274.91) 235.27,246.83 cw(c154.11,275.38) 233.17,241.45 cw(c152.87,275.92) 227.91,231.15 cw(c152.75,275.98) 221.35,221.63 cw(c153.67,275.25) 217.61,217.22 cw(c154.67,274.35) 213.58,213.08 cw(c155.84,273.13) 209.28,209.22 cw(c156.76,272.05) 199.94,202.47 cw(c155.32,274.32) 194.93,199.59 cw(c154.55,275.77) 189.74,197.06 cw(c154.02,276.95) 184.39,194.87 cw(c153.7,277.77) 156.11,189.41 cw(c153.86,274.87) 150.34,189.45 cw(c153.78,273.1) 144.58,189.89 cw(c153.77,272.64) 133.24,191.95 cw(c154.43,275.35) 127.69,193.56 cw(c154.91,276.83) 122.26,195.53 cw(c155.35,277.94) 116.97,197.86 cw(c155.7,278.67) 97.61,210.44 cw(c154.5,277.21) 93.34,214.33 cw(c153.43,276.11) 89.34,218.49 cw(c152.08,274.9) 85.63,222.91 cw(c151.42,274.36) 82.23,227.57 cw(c153.04,275.46) 79.16,232.46 cw(c154.59,276.36) 76.43,237.54 cw(c155.95,277.04) 74.03,242.8 cw(c157,277.48) 71.97,248.21 cw(c157.66,277.71) 67.29,270.81 cw(c155.69,277.53) 67.04,276.58 cw(c154.14,277.51) 67.17,282.36 cw(c152.32,277.61) 67.69,288.1 cw(c151.56,277.69) 68.6,293.8 cw(c153.48,277.32) 69.88,299.43 cw(c155.22,276.86) 71.54,304.96 cw(c156.66,276.38) 73.56,310.37 cw(c157.72,275.95) 75.92,315.65 cw(c158.39,275.62) 88.53,334.99 cw(c156.92,276.83) 92.41,339.27 cw(c155.83,277.89) 96.56,343.28 cw(c154.62,279.22) 100.96,347.01 cw(c154.45,279.38) 110.47,353.55 cw(c155.91,276.98) 115.53,356.33 cw(c156.62,275.59) 120.76,358.79 cw(c157.1,274.48) 126.14,360.91 cw(c157.36,273.8) 154.44,366.29 cw(c157.19,276.7) 160.22,366.28 cw(c157.25,278.44) 165.98,365.89 cw(c157.33,279.54) 177.35,363.98 cw(c156.73,276.84) 182.92,362.47 cw(c156.25,275.27) 188.39,360.61 cw(c155.78,274.04) 193.73,358.4 cw(c155.29,272.96) 203.97,353.02 cw(c155.3,272.95) 213.46,346.41 cw(c156.03,273.88) 217.88,342.68 cw(c156.92,274.86) 222.05,338.69 cw(c158.09,276.01) 225.96,334.43 cw(c159.52,277.24) 229.58,329.94 cw(c159.37,277.15) 232.89,325.22 cw(c157.74,276.08) 235.89,320.29 cw(c156.21,275.22) 238.58,315.17 cw(c154.89,274.58) 240.94,309.9 cw(c153.53,274.03) 244.66,298.95 cw(c153.35,273.95) 247.69,281.88 cw(c155.11,274.13) 247.99,276.11 cw(c156.61,274.16) 247.93,270.34 cw(c158.38,274.08) 247.51,264.58 cw(c159.2,274.02) 245.54,253.22 cw(c156.47,274.65) 244.01,247.65 cw(c154.91,275.13) 242.14,242.18 cw(c153.68,275.59) 239.93,236.84 cw(c152.59,276.09) 234.56,226.6 cw(c152.81,275.92) 224.3,212.63 cw(c154.39,274.56) 220.34,208.43 cw(c155.52,273.42) 216.12,204.48 cw(c156.75,272.03) 211.67,200.81 cw(c157.11,271.6) 206.99,197.44 cw(c156.01,273.23) 202.1,194.37 cw(c155.09,274.79) 197.03,191.61 cw(c154.4,276.17) 191.79,189.17 cw(c153.92,277.27) 186.41,187.05 cw(c153.63,278.05) 158.14,181.43 cw(c153.82,275.39) 152.37,181.34 cw(c153.79,273.72) 146.6,181.61 cw(c153.64,271.83) 140.86,182.24 cw(c153.7,272.05) 135.18,183.24 cw(c154.09,273.97) 129.57,184.59 cw(c154.56,275.67) 124.05,186.29 cw(c155.04,277.08) 118.64,188.32 cw(c155.63,278.5) 108.22,193.34 cw(c155.81,278.86) 93.88,203.08 cw(c154.84,277.64) 89.51,206.87 cw(c153.89,276.62) 85.39,210.91 cw(c152.67,275.45) 81.52,215.2 cw(c151.22,274.22) 77.94,219.72 cw(c151.61,274.49) 74.64,224.45 cw(c153.25,275.55) 71.65,229.39 cw(c154.77,276.42) 68.96,234.5 cw(c156.1,277.07) 66.58,239.76 cw(c157.51,277.64) 62.76,250.68 cw(c157.89,277.78) 59.49,267.71 cw(c156.36,277.6) 59.08,273.47 cw(c154.98,277.54) 59.01,279.25 cw(c153.3,277.58) 59.28,285.02 cw(c151.41,277.73) 59.92,290.75 cw(c151.61,277.68) 60.91,296.43 cw(c153.52,277.28) 62.25,302.05 cw(c155.24,276.82) 63.93,307.57 cw(c156.67,276.34) 65.94,312.99 cw(c158.14,275.73) 70.89,323.45 cw(c158.4,275.63) 84.23,342.29 cw(c156.54,277.24) 88.22,346.47 cw(c155.4,278.4) 92.45,350.4 cw(c154.17,279.8) 96.91,354.06 cw(c153.78,280.28) 101.58,357.44 cw(c154.88,278.65) 106.46,360.53 cw(c155.81,277.08) 111.51,363.32 cw(c156.54,275.67) 116.73,365.81 cw(c157.05,274.52) 122.08,367.99 cw(c157.39,273.66) 156.03,374.37 cw(c157.23,277.19) 161.8,374.27 cw(c157.31,278.98) 167.56,373.82 cw(c157.38,279.88) 178.92,371.88 cw(c156.77,277.14) 184.5,370.4 cw(c156.3,275.53) 189.99,368.6 cw(c155.82,274.22) 195.37,366.47 cw(c155.27,272.95) 205.72,361.32 cw(c155.18,272.76) 220,351.48 cw(c156.21,274.03) 224.35,347.67 cw(c157.16,275.06) 228.47,343.63 cw(c158.38,276.23) 232.35,339.35 cw(c159.82,277.46) 235.96,334.85 cw(c159.77,277.45) 239.29,330.14 cw(c158.13,276.36) 242.33,325.24 cw(c156.58,275.46) 245.09,320.16 cw(c155.2,274.76) 247.54,314.93 cw(c154.07,274.27) 249.7,309.56 cw(c153.28,273.95) 256.05,275.61 cw(c156.79,274.12) 255.97,269.83 cw(c158.57,274.04) 255.55,264.08 cw(c159.8,273.93) 253.68,252.69 cw(c157.09,274.52) 252.25,247.1 cw(c155.45,274.99) 250.49,241.6 cw(c154.08,275.47) 248.42,236.2 cw(c152.71,276.05) 243.39,225.79 cw(c152.53,276.11) 230.02,206.96 cw(c154.38,274.52) 226.05,202.76 cw(c155.51,273.38) 221.85,198.8 cw(c156.73,272.01) 217.43,195.09 cw(c157.01,271.72) 207.96,188.5 cw(c155.5,274.12) 202.96,185.63 cw(c154.72,275.59) 197.79,183.04 cw(c154.13,276.84) 192.48,180.75 cw(c153.63,278.13) 181.52,177.06 cw(c153.54,278.38) 164.48,173.84 cw(c153.72,276.85) 158.72,173.4 cw(c153.78,275.5) 152.94,173.28 cw(c153.77,273.86) 147.17,173.5 cw(c153.64,272.01) 141.43,174.04 cw(c153.68,272) 130.09,176.14 cw(c154.33,274.77) 124.52,177.68 cw(c154.81,276.34) 119.05,179.53 cw(c155.28,277.61) 113.68,181.68 cw(c155.83,278.84) 103.34,186.86 cw(c155.92,279.05) 89.03,196.65 cw(c154.95,277.83) 84.64,200.42 cw(c154.05,276.83) 80.48,204.42 cw(c152.88,275.68) 76.54,208.65 cw(c151.48,274.46) 72.86,213.09 cw(c151.42,274.36) 66.31,222.58 cw(c153.83,275.86) 63.45,227.6 cw(c155.29,276.64) 60.87,232.76 cw(c156.54,277.22) 58.58,238.07 cw(c157.84,277.73) 54.87,249.03 cw(c158.14,277.84) 51.58,266.06 cw(c156.68,277.66) 51.1,271.82 cw(c155.38,277.59) 50.94,277.59 cw(c153.78,277.59) 51.1,283.36 cw(c151.95,277.69) 51.59,289.11 cw(c151.23,277.75) 53.56,300.48 cw(c154,277.13) 55.02,306.06 cw(c155.64,276.65) 56.79,311.56 cw(c156.99,276.18) 58.87,316.96 cw(c158.38,275.59) 63.87,327.38 cw(c158.67,275.47) 77.07,346.34 cw(c156.94,276.91) 80.98,350.6 cw(c155.85,277.97) 85.11,354.63 cw(c154.65,279.28) 89.46,358.42 cw(c153.44,280.75) 94.02,361.96 cw(c153.99,279.97) 98.77,365.24 cw(c155.04,278.34) 103.7,368.24 cw(c155.92,276.8) 108.79,370.96 cw(c156.61,275.44) 114.03,373.41 cw(c157.27,273.88) 124.86,377.44 cw(c157.52,273.17) 147.52,381.98 cw(c157.31,275.05) 153.29,382.35 cw(c157.26,276.45) 159.06,382.41 cw(c157.29,278.13) 164.83,382.15 cw(c157.43,280.01) 170.57,381.57 cw(c157.51,280.75) 176.27,380.67 cw(c157.15,278.81) 181.91,379.45 cw(c156.7,277.01) 187.48,377.92 cw(c156.22,275.43) 192.95,376.08 cw(c155.75,274.13) 198.33,373.96 cw(c155.19,272.83) 208.72,368.86 cw(c155.14,272.68) 227.61,355.57 cw(c156.63,274.45) 231.85,351.65 cw(c157.71,275.55) 235.88,347.51 cw(c159.01,276.75) 239.67,343.15 cw(c160.49,277.97) 243.21,338.6 cw(c159.76,277.45) 246.49,333.85 cw(c158.13,276.39) 249.5,328.93 cw(c156.58,275.5) 252.24,323.85 cw(c155.2,274.8) 254.71,318.62 cw(c153.61,274.11) 258.81,307.81 cw(c152.98,273.87) 263.98,279.43 cw(c155.78,274.08) 264.11,273.65 cw(c157.4,274.07) 263.93,267.88 cw(c159.23,273.96) 263.44,262.13 cw(c160.06,273.9) 261.5,250.76 cw(c157.28,274.5) 260.07,245.17 cw(c155.62,274.97) 258.34,239.66 cw(c154.22,275.45) 256.31,234.24 cw(c152.73,276.07) 251.44,223.76 cw(c152.14,276.35) 238.58,204.56 cw(c153.62,275.16) 234.77,200.21 cw(c154.65,274.21) 230.74,196.08 cw(c155.81,273.02) 226.49,192.16 cw(c157.03,271.62) 222.05,188.48 cw(c157.24,271.41) 212.58,181.89 cw(c155.71,273.84) 207.6,178.98 cw(c154.89,275.32) 202.46,176.35 cw(c154.27,276.63) 197.18,173.98 cw(c153.67,278.07) 186.3,170.07 cw(c153.49,278.6) 163.61,165.67 cw(c153.7,276.65) 157.85,165.31 cw(c153.75,275.24) 152.07,165.24 cw(c153.72,273.57) 146.3,165.49 cw(c153.59,271.7) 140.56,166.04 cw(c153.6,271.46) 129.2,168.07 cw(c154.23,274.26) 123.62,169.55 cw(c154.71,275.89) 118.12,171.31 cw(c155.18,277.26) 112.72,173.36 cw(c155.79,278.71) 102.25,178.27 cw(c156.06,279.27) 83.06,191.14 cw(c154.87,277.79) 78.7,194.94 cw(c153.93,276.77) 74.55,198.96 cw(c152.76,275.62) 70.62,203.19 cw(c151.37,274.39) 66.92,207.62 cw(c150.85,273.95) 60.27,217.04 cw(c153.25,275.49) 57.33,222.01 cw(c154.76,276.33) 54.64,227.13 cw(c156.1,276.99) 52.23,232.38 cw(c157.63,277.63) 48.21,243.22 cw(c158.17,277.84) 43.05,271.61 cw(c155.4,277.63) 42.89,277.38 cw(c153.81,277.62) 43.03,283.16 cw(c152,277.71) 43.47,288.91 cw(c150.48,277.86) 45.27,300.3 cw(c153.15,277.31) 46.62,305.92 cw(c154.87,276.85) 48.26,311.45 cw(c156.36,276.37) 50.18,316.9 cw(c158.04,275.72) 54.84,327.48 cw(c158.94,275.29) 70.87,351.48 cw(c157.08,276.84) 74.77,355.75 cw(c156,277.87) 78.87,359.82 cw(c154.81,279.14) 83.17,363.66 cw(c153.58,280.59) 87.67,367.27 cw(c153.34,280.88) 92.36,370.64 cw(c154.45,279.24) 97.21,373.76 cw(c155.41,277.65) 102.23,376.62 cw(c156.2,276.18) 107.38,379.23 cw(c156.81,274.91) 112.67,381.57 cw(c157.39,273.49) 123.56,385.46 cw(c157.58,272.94) 146.23,389.94 cw(c157.37,274.79) 152,390.35 cw(c157.3,276.15) 157.77,390.47 cw(c157.31,277.77) 163.55,390.3 cw(c157.41,279.59) 169.3,389.83 cw(c157.54,280.9) 180.68,387.99 cw(c156.98,278.18) 186.29,386.63 cw(c156.51,276.46) 191.83,384.98 cw(c156.03,274.98) 197.28,383.06 cw(c155.38,273.3) 207.86,378.41 cw(c154.92,272.34) 231.92,362.47 cw(c156.39,274.13) 236.22,358.61 cw(c157.39,275.19) 240.32,354.54 cw(c158.62,276.36) 244.2,350.26 cw(c160.04,277.59) 247.86,345.8 cw(c160.15,277.72) 254.45,336.33 cw(c157.72,276.18) 257.37,331.35 cw(c156.22,275.35) 260.04,326.23 cw(c154.89,274.69) 262.46,320.98 cw(c153.35,274.04) 266.51,310.15 cw(c152.67,273.8) 271.9,281.8 cw(c155.22,274.02) 272.14,276.02 cw(c156.74,274.05) 272.1,270.25 cw(c158.48,273.99) 271.76,264.49 cw(c160.39,273.83) 271.13,258.75 cw(c160.8,273.79) 270.2,253.06 cw(c158.85,274.16) 268.99,247.42 cw(c157.03,274.6) 267.48,241.84 cw(c155.42,275.08) 265.7,236.35 cw(c154.06,275.55) 263.66,230.94 cw(c152.58,276.16) 258.78,220.45 cw(c152.07,276.39) 242.42,196.68 cw(c154.11,274.68) 238.49,192.44 cw(c155.21,273.6) 234.36,188.41 cw(c156.41,272.31) 230.03,184.59 cw(c157.64,270.84) 225.52,180.99 cw(c157.77,270.7) 220.83,177.64 cw(c156.65,272.35) 215.97,174.52 cw(c155.69,273.94) 210.96,171.65 cw(c154.89,275.41) 205.81,169.03 cw(c154.27,276.7) 200.54,166.66 cw(c153.66,278.17) 189.67,162.69 cw(c153.46,278.71) 161.3,157.43 cw(c153.69,276.08) 155.52,157.2 cw(c153.71,274.56) 149.75,157.25 cw(c153.65,272.81) 143.99,157.59 cw(c153.49,270.91) 138.25,158.22 cw(c153.44,270.41) 132.55,159.14 cw(c153.81,272.36) 126.91,160.34 cw(c154.24,274.18) 121.33,161.83 cw(c154.72,275.81) 115.83,163.59 cw(c155.2,277.2) 110.42,165.61 cw(c155.82,278.72) 99.9,170.42 cw(c156.14,279.4) 75.99,186.58 cw(c154.57,277.5) 71.71,190.47 cw(c153.54,276.42) 67.62,194.55 cw(c152.31,275.25) 63.74,198.83 cw(c150.88,274.02) 60.08,203.29 cw(c150.63,273.78) 53.46,212.74 cw(c153.06,275.34) 50.51,217.7 cw(c154.58,276.19) 47.81,222.8 cw(c155.95,276.88) 45.35,228.03 cw(c157.56,277.58) 41.18,238.82 cw(c158.59,277.94) 35.31,267.08 cw(c156.44,277.71) 34.94,272.85 cw(c155.04,277.65) 34.85,278.62 cw(c153.4,277.67) 35.03,284.4 cw(c151.58,277.77) 35.5,290.15 cw(c150.05,277.93) 37.3,301.54 cw(c152.73,277.39) 38.62,307.16 cw(c154.49,276.93) 40.21,312.71 cw(c156.03,276.45) 42.07,318.18 cw(c157.84,275.77) 46.55,328.84 cw(c159.12,275.18) 65.63,357.71 cw(c156.95,277) 69.56,361.95 cw(c155.85,278.07) 73.68,365.99 cw(c154.66,279.34) 78,369.83 cw(c153.43,280.8) 82.49,373.45 cw(c152.98,281.37) 87.16,376.84 cw(c154.1,279.74) 91.99,380 cw(c155.1,278.13) 96.96,382.92 cw(c155.93,276.63) 102.08,385.6 cw(c156.6,275.28) 107.32,388.04 cw(c157.28,273.69) 118.12,392.17 cw(c157.63,272.69) 146.39,398.03 cw(c157.4,274.84) 152.16,398.41 cw(c157.34,276.22) 157.93,398.52 cw(c157.35,277.84) 163.7,398.36 cw(c157.45,279.66) 169.46,397.91 cw(c157.64,281.59) 175.18,397.19 cw(c157.52,280.87) 180.86,396.18 cw(c157.13,278.94) 186.49,394.9 cw(c156.68,277.17) 192.05,393.35 cw(c156.2,275.59) 197.54,391.54 cw(c155.73,274.26) 202.94,389.47 cw(c155.12,272.8) 213.42,384.6 cw(c154.83,272.19) 237.34,368.43 cw(c156.37,274.06) 241.64,364.56 cw(c157.36,275.11) 245.75,360.5 cw(c158.57,276.27) 249.66,356.26 cw(c159.96,277.49) 253.36,351.83 cw(c160.84,278.22) 260.1,342.46 cw(c158.48,276.66) 263.12,337.54 cw(c156.92,275.76) 265.9,332.48 cw(c155.5,275.02) 268.45,327.3 cw(c153.76,274.22) 272.82,316.59 277.12,305.32 ccw(c280.85,306.75) 280.45,302.77 v1(299,301)
  Bottom Layer w8: v1(168,267) 180.1,250.24

## Keep-outs
Keep-Out Layer:
  the board outline again, w5
Mechanical 1:
  lines w5: 284.38,0.25 284.38,197.1 ; 284.38,354.58 284.38,551.43 ; 520.6,39.62 520.6,236.47 ; 520.6,315.21 520.6,512.06

## Silkscreen, mask and mechanical layers (free items; w line width, h text height)
Top Overlay:
  drawing of 462 lines, arcs and shapes, not listed
  text "V0.1" at 411,259.5 h60
Mechanical 1:
  lines w5: 284.38,0.25 261.24,0.25 ccw(c221.87,0.25) 182.5,0.25 159.36,0.25 0.25,275.84 159.36,551.43 182.5,551.43 ccw(c221.87,551.43) 261.24,551.43 284.38,551.43 ; 284.38,197.1 402.49,197.1 402.49,236.47 520.6,236.47 ; 284.38,354.58 402.49,354.58 402.49,315.21 520.6,315.21 ; 520.6,39.62 658.55,39.62 804.06,266.99 804.06,284.69 658.55,512.06 520.6,512.06
  text "补强说明： / 1.补强：3M背胶补强 / 2.补强区域：整个板框区域" at 106,615 h60